# Altium PCB front.PcbDoc
Units mm, origin at the board's own origin, x right, y up, seen from the top; angles counter-clockwise.
Board outline 56.25 x 24.25 mm, 2 copper layers (TopLayer, BottomLayer); 25 components, 31 nets, 52 pads, 2 vias.
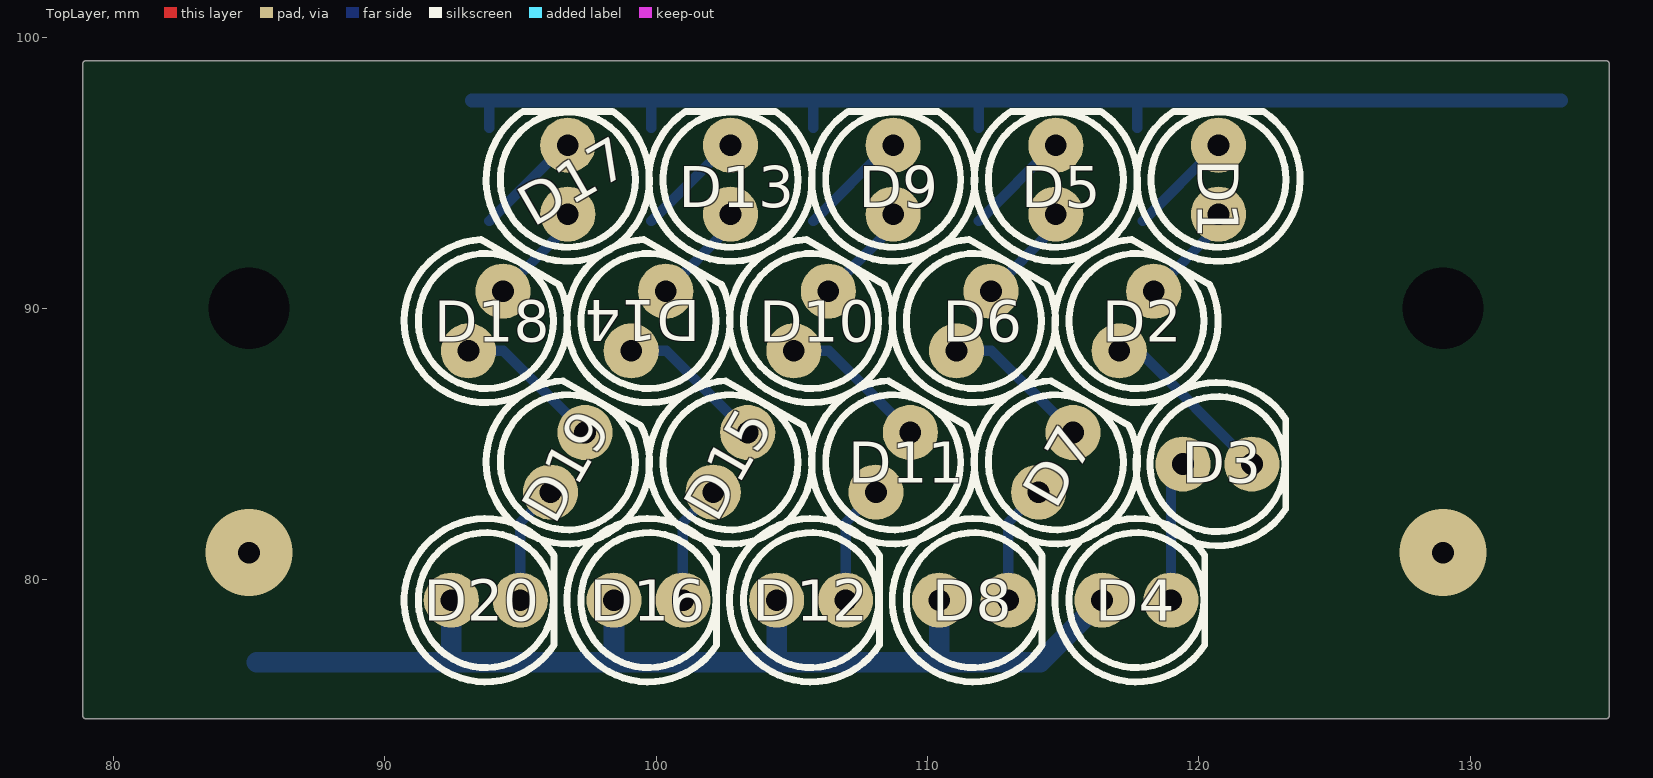
[diagram p0: TopLayer view]
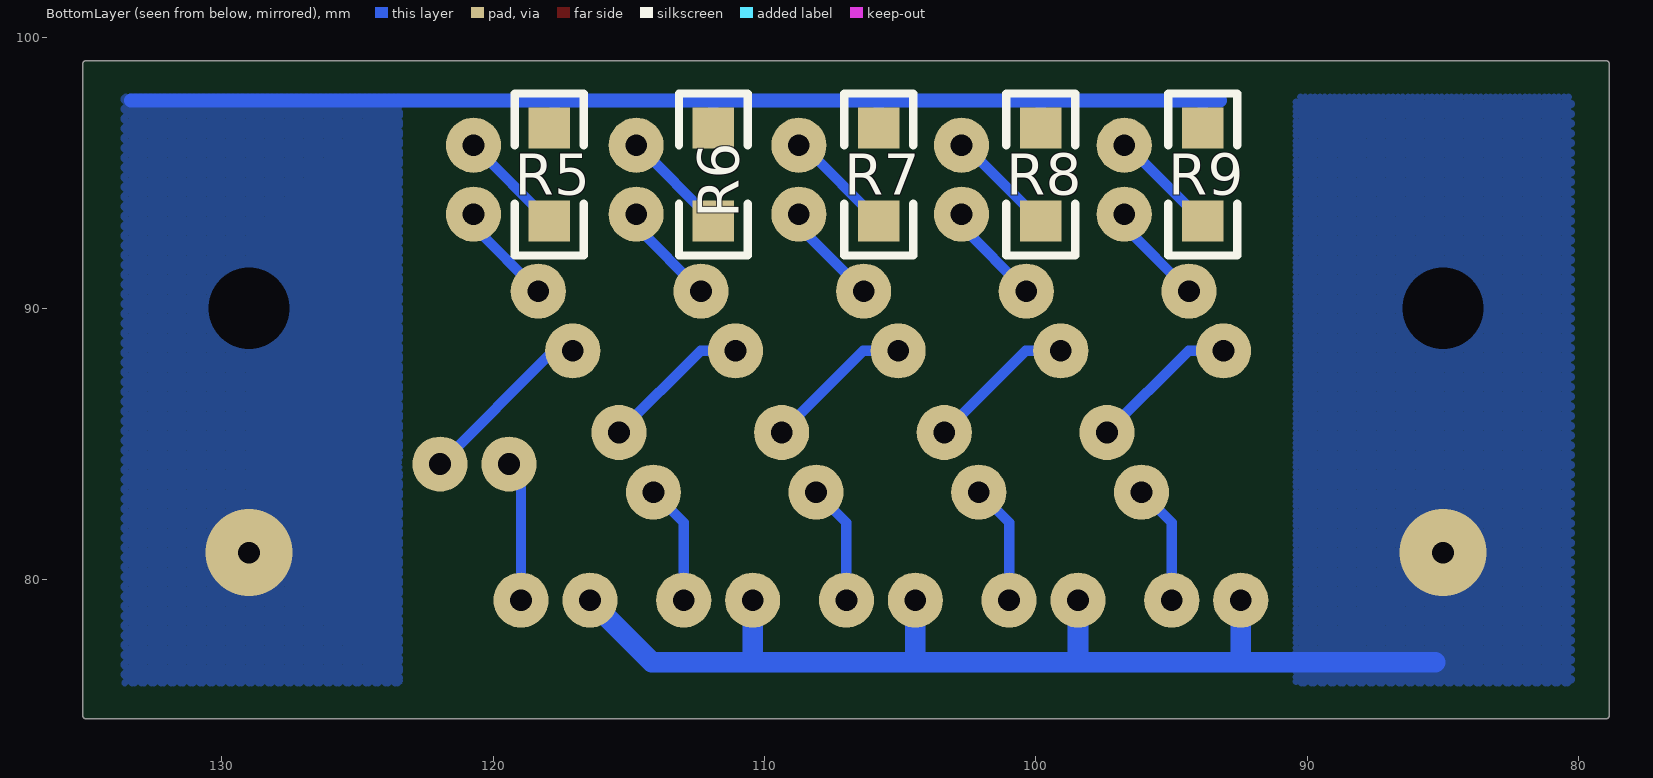
[diagram p1: BottomLayer view, seen from below]

## Layer stack, top to bottom
TopLayer: signal copper 0.0356
Dielectric: core 0.32, FR-4, Dk 4.8
BottomLayer: signal copper 0.0356

## Board outline
78.873,75 ccw(c79,75) 79,74.873 135,74.873 ccw(c135,75) 135.127,75 135.127,99 ccw(c135,99) 135,99.127 79,99.127 ccw(c79,99) 78.873,99

## Design rules (kind name [scope] priority, off if disabled: settings)
Clearance [All] p1: gap=0.2
FabricationTestPointUsage TestPointUsage [All] p1: valid=0 allowmultiple=FALSE
FabricationTestpoint Testpoint [All] p1: side=3 testpointundercomponent=TRUE minsize=1.016 maxsize=2.54 preferedsize=1.524 minholesize=0.508 maxholesize=1.016 preferedholesize=0.813 testpointgrid=0.025 allowsidetop=TRUE allowsidebottom=TRUE usegrid=TRUE gridtolerance=0
HoleSize [All] p1: absolutevalues=TRUE maxlimit=2.54 minlimit=0.4 maxpercent=80.000 minpercent=20.000
PasteMaskExpansion PasteMaskExpansion_1 [All] p1: expansion=0
PasteMaskExpansion [All] p2: expansion=0
PlaneClearance PlaneClearance_1 [All] p1: clearance=0.508
PlaneClearance [All] p2: clearance=0.254
PolygonConnect [All] p1: connectstyle=Relief reliefconductorwidth=0.254 reliefentries=4 polygonreliefangle="90 Angle"
RoutingLayers RoutingLayers_2 [InNet('GND')] p1: top layer_v5=FALSE bottom layer_v5=FALSE
RoutingLayers RoutingLayers_1 [InNet('+12V')] p2: top layer_v5=FALSE bottom layer_v5=FALSE
RoutingLayers [All] p3: top layer_v5=TRUE bottom layer_v5=TRUE
RoutingPriority RoutingPriority_2 [InNet('GND')] p1: routingpriority=50
RoutingPriority RoutingPriority_1 [InNet('+12V')] p2: routingpriority=50
RoutingPriority [All] p3: routingpriority=0
RoutingTopology RoutingTopology_2 [InNet('GND')] p1: topology=Shortest
RoutingTopology RoutingTopology_1 [InNet('+12V')] p2: topology=Shortest
RoutingTopology [All] p3: topology=Shortest
RoutingVias RoutingVias_2 [InNet('GND')] p1 off: holewidth=0.762 width=1.27 viastyle="Through Hole" minholewidth=0.762 minwidth=1.27 maxholewidth=0.762 maxwidth=1.27
RoutingVias RoutingVias_1 [InNet('+12V')] p2 off: holewidth=0.762 width=1.27 viastyle="Through Hole" minholewidth=0.762 minwidth=1.27 maxholewidth=0.762 maxwidth=1.27
RoutingVias [All] p3: holewidth=0.711 width=1.27 viastyle="Through Hole" minholewidth=0.4 minwidth=0.7 maxholewidth=0.711 maxwidth=1.27
ShortCircuit ShortCircuit_1 [All] p1: allowed=FALSE
ShortCircuit [All] p2: allowed=FALSE
SilkscreenOverComponentPads [All] p1: minsilkscreentomaskgap=0.254
SolderMaskExpansion SolderMaskExpansion_1 [All] p1: expansion=0.102
SolderMaskExpansion [All] p2: expansion=0.051
UnRoutedNet UnRoutedNet_1 [All] p1:
UnRoutedNet [All] p2:
Width Width_2 [InNet('GND')] p1 off: maxlimit=0.508 minlimit=0.508 preferedwidth=0.508
Width Width_1 [InNet('+12V')] p2 off: maxlimit=0.508 minlimit=0.508 preferedwidth=0.508
Width [All] p3: maxlimit=1.016 minlimit=0.2 preferedwidth=0.381
17 further rules are at their usual default settings.

## Components (designator, comment, footprint, x,y, rotation, side; value= is the part's Value field where it differs from the comment)
D1 "LED" LED5 120.726,94.742 r270 top
D2 "LED" LED5 117.704,89.535 r240 top
D3 "LED" LED5 120.688,84.262 r180 top
D4 "LED" LED5 117.704,79.248 r180 top
D5 "LED" LED5 114.732,94.742 r270 top
D6 "LED" LED5 111.709,89.535 r240 top
D7 "LED" LED5 114.732,84.328 r240 top
D8 "LED" LED5 111.709,79.248 r180 top
D9 "LED" LED5 108.737,94.742 r270 top
D10 "LED" LED5 105.715,89.535 r240 top
D11 "LED" LED5 108.737,84.328 r240 top
D12 "LED" LED5 105.715,79.248 r180 top
D13 "LED" LED5 102.743,94.742 r270 top
D14 "LED" LED5 99.72,89.535 r240 top
D15 "LED" LED5 102.743,84.328 r240 top
D16 "LED" LED5 99.72,79.248 r180 top
D17 "LED" LED5 96.749,94.742 r270 top
D18 "LED" LED5 93.726,89.535 r240 top
D19 "LED" LED5 96.749,84.328 r240 top
D20 "LED" LED5 93.726,79.248 r180 top
R5 "56" 1206 117.932,93.218 r90 bottom
R6 "56" 1206 111.887,93.218 r90 bottom
R7 "56" 1206 105.791,93.218 r90 bottom
R8 "56" 1206 99.822,93.218 r90 bottom
R9 "56" 1206 93.853,93.218 r90 bottom

## Footprints (in the part's own frame and the unit in brackets; to place one, negate y for a bottom-side part, rotate by r counter-clockwise, add the part's x,y. Pads: shape width x height; smd on the part's side, far side on the other; paste and mask are expansions set on the pad)
1206 [mil]
  rect 60x60 smd: 1(0,0) 2(135,0)
  silkscreen extent -50,-50 185,50
LED5 [mil]
  round 80 hole 31.5: A(50,0) K(-50,0)
  silkscreen extent -99,-118 118,118

## Free pads (board coordinates)
  round 0 hole 3: 0(85,90) 0(129,90)

## Via types
v1: diameter 3.2, hole 0.8, TopLayer to BottomLayer, 2 vias

## Nets (pads, with @x,y where several pads share a name; then routed paths per layer and width w, separated by ;. In a path a pad name is that pad's centre, name@x,y a point inside that pad or via, vN(x,y) a via of type N, cw(c..) or ccw(c..) an arc to the next point about the centre after c; other vN are vias at no path point)
+12V: 
GND: D4.A D8.A D12.A D16.A D20.A pad.0@85,90 | length 41
  BottomLayer w0.762: 85.285,76.962 114.148,76.962 D4.A ; 92.456,76.962 D20.A ; 98.45,77.064 D16.A ; 104.445,77.013 D12.A ; 110.439,77.013 D8.A
  other v1: 85,81
NetC2_1: 
NetD1_A: D1.A D2.K | length 3.8
  BottomLayer w0.381: D2.K 120.726,93.022 D1.A
NetD1_K: D1.K R5.1 | length 4
  BottomLayer w0.381: R5.1 D1.K
NetD2_A: D2.A D3.K | length 6.6
  BottomLayer w0.381: D2.A 117.785,88.435 D3.K
NetD3_A: D3.A D4.K | length 5.2
  BottomLayer w0.381: D4.K 118.974,83.817 D3.A
NetD5_A: D5.A D6.K | length 3.8
  BottomLayer w0.381: D6.K 114.732,93.022 D5.A
NetD5_K: D5.K R6.1 | length 4
  BottomLayer w0.381: R6.1 D5.K@114.681,96.012
NetD6_A: D6.A D7.K | length 5.5
  BottomLayer w0.381: D6.A 112.36,88.435 D7.K
NetD7_A: D7.A D8.K | length 4.4
  BottomLayer w0.381: D8.K 112.979,82.111 D7.A
NetD9_A: D9.A D10.K | length 3.8
  BottomLayer w0.381: D10.K 108.737,93.022 D9.A
NetD9_K: D9.K R7.1 | length 4
  BottomLayer w0.381: R7.1 D9.K@108.585,96.012
NetD10_A: D10.A D11.K | length 5.5
  BottomLayer w0.381: D10.A 106.365,88.435 D11.K
NetD11_A: D11.A D12.K | length 4.4
  BottomLayer w0.381: D12.K 106.985,82.111 D11.A
NetD13_A: D13.A D14.K | length 3.8
  BottomLayer w0.381: D14.K 102.743,93.022 D13.A
NetD13_K: D13.K R8.1 | length 4
  BottomLayer w0.381: R8.1 D13.K@102.616,96.012
NetD14_A: D14.A D15.K | length 5.5
  BottomLayer w0.381: D14.A 100.371,88.435 D15.K
NetD15_A: D15.A D16.K | length 4.4
  BottomLayer w0.381: D16.K 100.99,82.111 D15.A
NetD17_A: D17.A D18.K | length 3.8
  BottomLayer w0.381: D18.K 96.749,93.022 D17.A
NetD17_K: D17.K R9.1 | length 4
  BottomLayer w0.381: R9.1 D17.K@96.647,96.012
NetD18_A: D18.A D19.K | length 5.5
  BottomLayer w0.381: D18.A 94.376,88.435 D19.K
NetD19_A: D19.A D20.K | length 4.4
  BottomLayer w0.381: D20.K 94.996,82.111 D19.A
NetJ1_3: 
NetQ1_3: pad.0@129,90 R5.2 R6.2 R7.2 R8.2 R9.2 | length 45.2
  BottomLayer w0.381: R9.2 93.853,97.663 ; R8.2 99.822,97.663 ; R7.2 105.791,97.663 ; R6.2 111.887,97.663 ; R5.2@117.729,96.647 117.729,97.663
  BottomLayer w0.508: 93.218,97.663 133.35,97.663
  other v1: 129,81
NetR1_1: 
NetU1_3: 
NetU1_4: 
NetU1_5: 
NetU1_13: 
VCC: 

## Polygon pours and split planes (outlines as drawn)
NetQ1_3 on BottomLayer "BottomLayer-NetQ1_3" (hatched 45Degree grid 0.254 track 0.254, pour order 1005): 123.444,97.79 123.444,76.2 133.604,76.2 133.604,97.79
GND on BottomLayer "BottomLayer-GND" (hatched 45Degree grid 0.254 track 0.254, pour order 1004): 80.264,97.79 80.264,76.2 90.424,76.2 90.424,97.79

## Silkscreen, mask and mechanical layers (free items; w line width, h text height)
Mechanical1:
  lines w0.254: 79,75 135,75 135,99 79,99 79,75
Mechanical3:
  lines w0.254: 84.836,86.36 85.852,86.36 ; 85.344,82.296 85.344,89.662 ; 90.424,76.2 90.424,97.79 ; 123.444,76.2 123.444,97.79 ; 128.016,86.36 129.032,86.36 ; 128.524,84.582 128.524,88.9
Mechanical4:
  lines w0.254: 80.264,76.2 90.424,76.2 123.444,76.2 133.604,76.2 133.604,97.79 123.444,97.79 90.424,97.79 80.264,97.79